# Altium PCB Power Reg Breakout V1.PcbDoc (part 1 of 2)
Units mil, origin at the board's own origin, x right, y up, seen from the top; angles counter-clockwise.
Board outline 1959 x 2445 mil, 2 copper layers (Top Layer, Bottom Layer); 83 components, 39 nets, 230 pads, 125 vias.
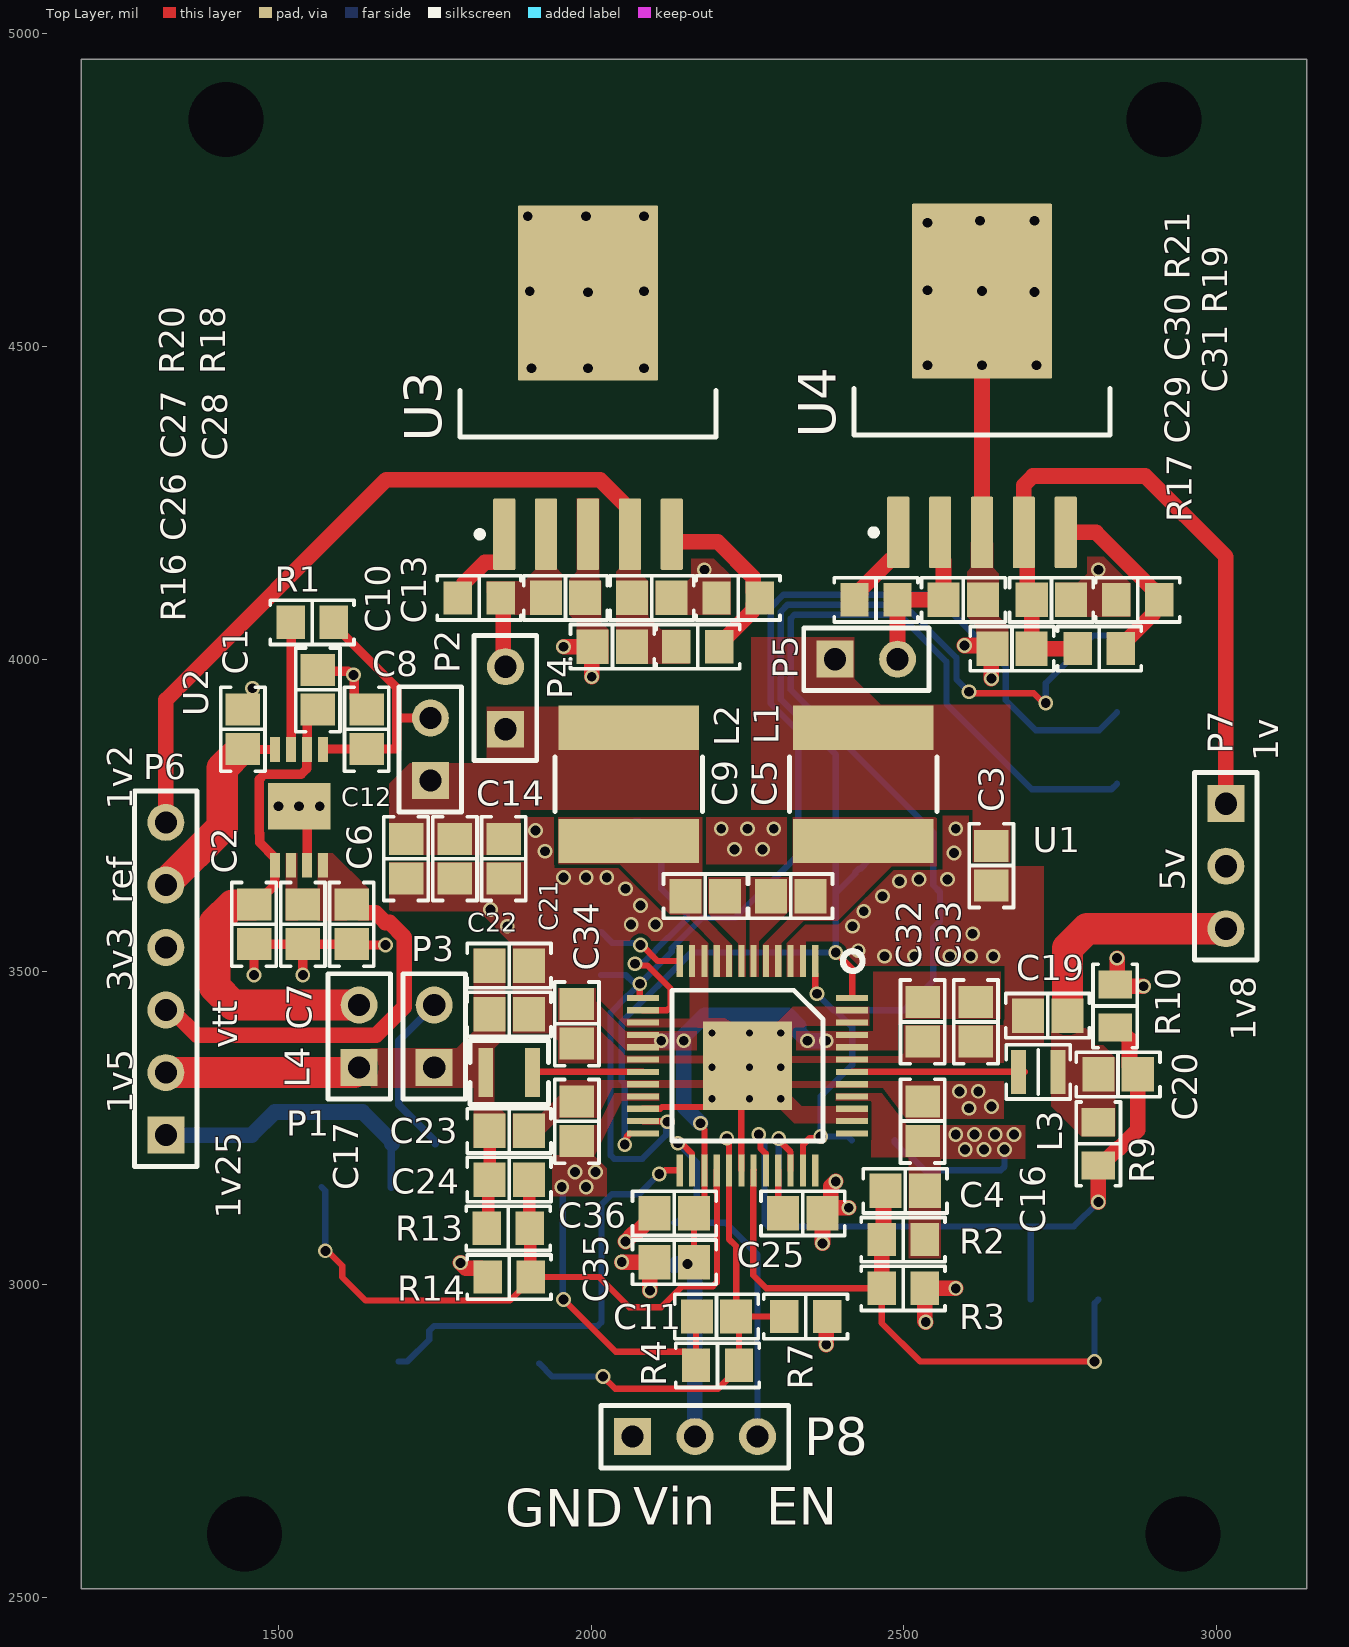
[diagram p0: Top Layer view]
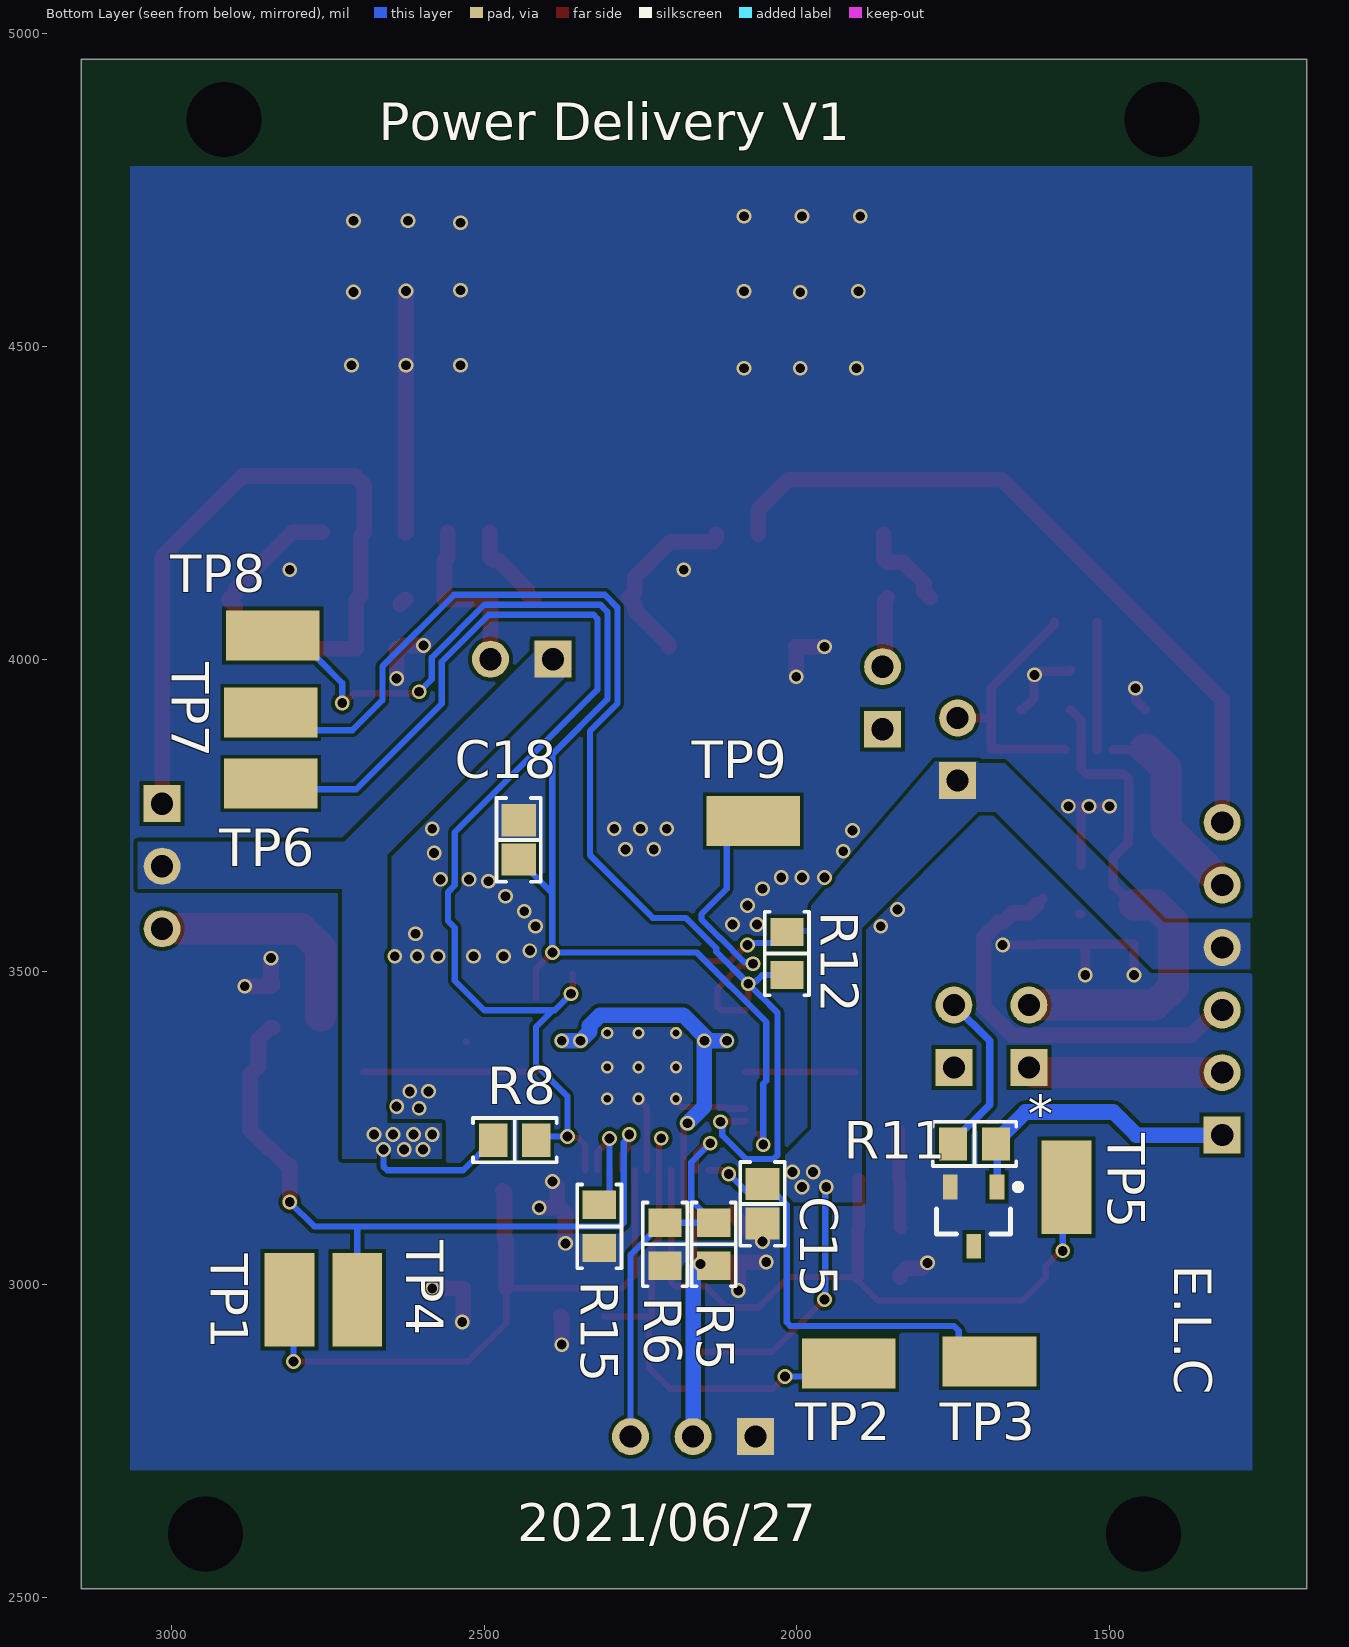
[diagram p1: Bottom Layer view, seen from below]
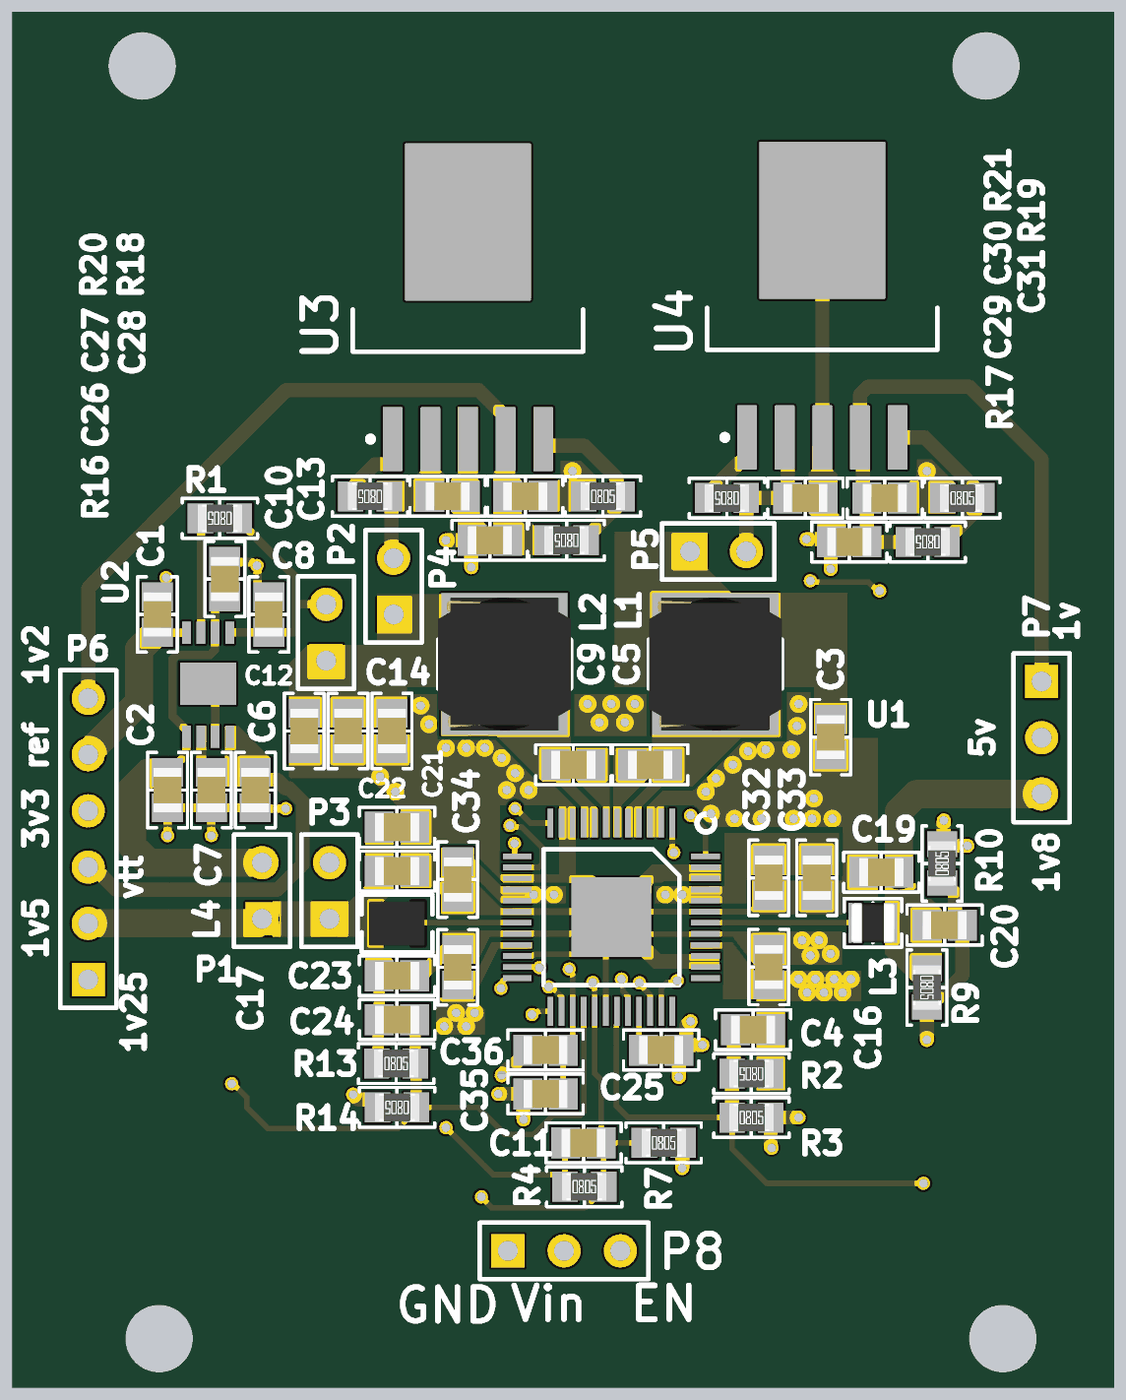
[diagram p2: 3D render of the assembled board from above, using the file's embedded part models]
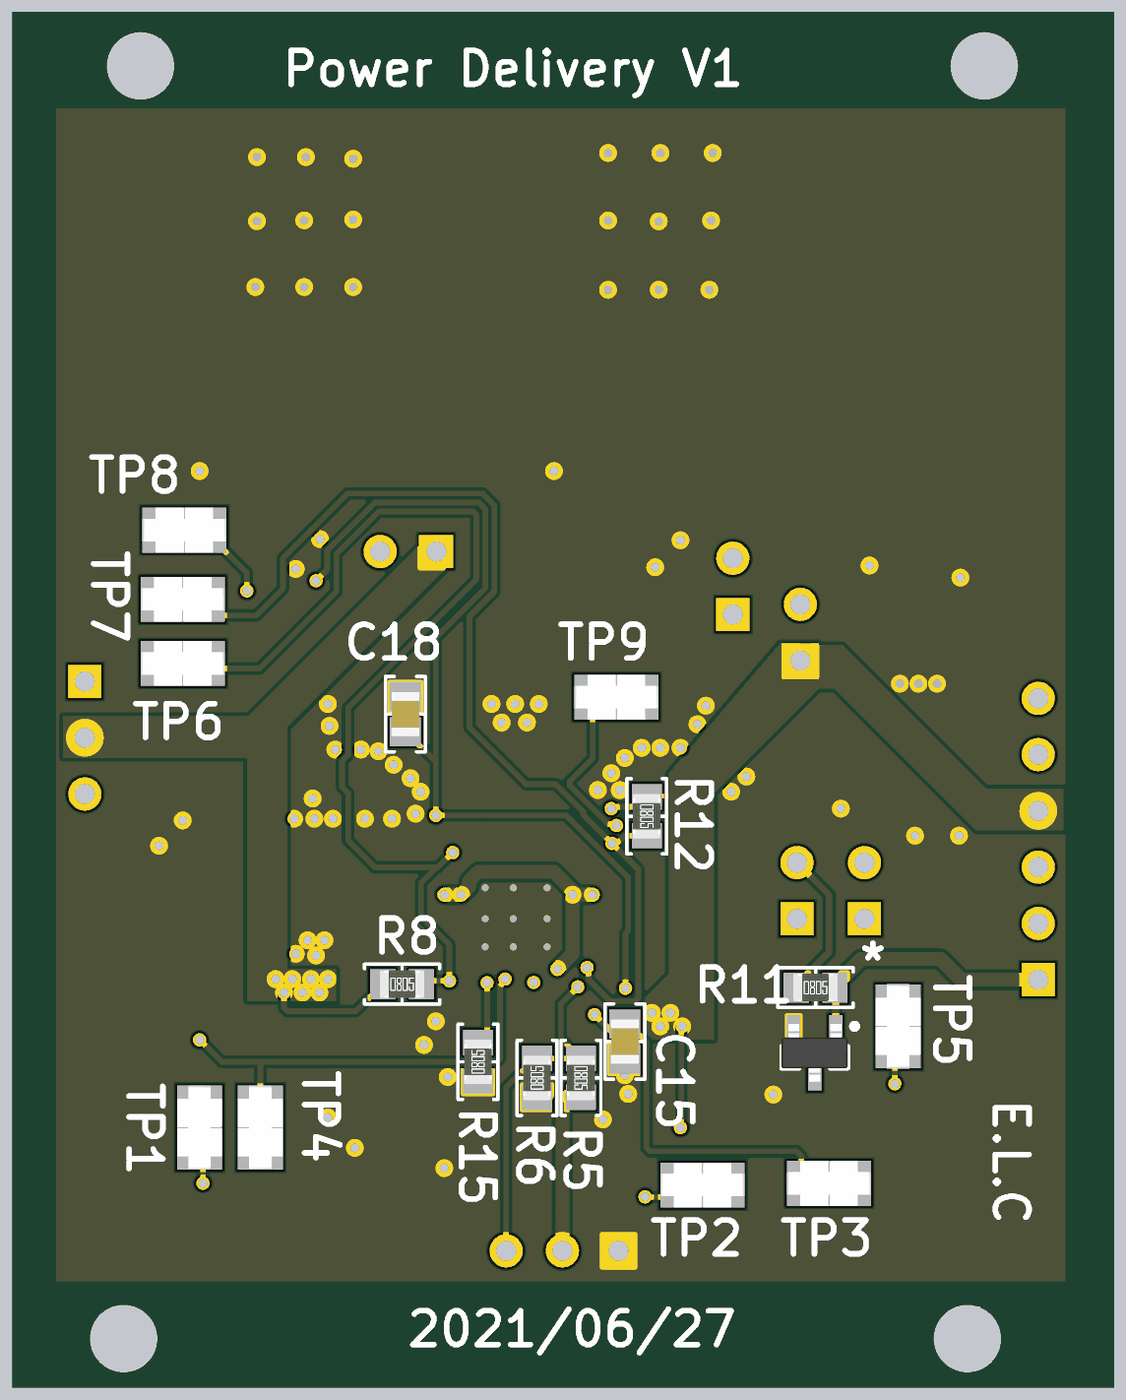
[diagram p3: 3D render of the assembled board from below, using the file's embedded part models]

## Layer stack, top to bottom
Top Solder: solder mask 0.4, Solder Resist, Dk 3.5
Top Layer: signal copper 1.4
Dielectric 1: dielectric 12.6, FR-4, Dk 4.8
Bottom Layer: signal copper 1.4
Bottom Solder: solder mask 0.4, Solder Resist, Dk 3.5

## Board outline
1185,2514 3144,2514 3144,4959 1185,4959

## Design rules (kind name [scope] priority, off if disabled: settings)
Clearance [All] p1: gap=6 ignorepadtopadclearanceinfootprint=FALSE
PolygonConnect [All] p1: connectstyle=Direct reliefconductorwidth=10 reliefentries=4 polygonreliefangle="90 Angle" airgapwidth=10
RoutingVias [All] p1: holewidth=15.75 width=23.62 viastyle="Through Hole" minholewidth=7.87 minwidth=15.75 maxholewidth=248.03 maxwidth=50
SolderMaskExpansion [All] p1: expansion=4 istentingtop=FALSE
Width [All] p1: maxlimit=60 minlimit=6 preferedwidth=10
30 further rules are at their usual default settings.

## Classes and differential pairs
component class "Power Regulator Breakout V1": P6 P7 P8

## Components (designator, comment, footprint, x,y, rotation, side; value= is the part's Value field where it differs from the comment)
* "1.25V Shunt" TS4061AILT-1.25 1717.4,3108.76 r270 bottom
C1 "0.1µF" "CAP 0805_2012" 1443,3888 r90 top
C2 "10µF" "CAP 0805_2012" 1461,3576 r270 top
C3 "1µF" "CAP 0805_2012" 2640,3670 r90 top
C4 "10pF" "CAP 0805_2012" 2502,3150 r0 top
C5 "0.1µF" "CAP 0805_2012" 2319,3621 r0 top
C6 "10µF" "CAP 0805_2012" 1617,3576 r90 top
C7 "10µF" "CAP 0805_2012" 1539,3576 r90 top
C8 "4.7µF" "CAP 0805_2012" 1641,3888 r270 top
C9 "0.1µF" "CAP 0805_2012" 2182.5,3621 r180 top
C10 "0.1µF" "CAP 0805_2012" 1563,3951 r270 top
C11 "22pF" "CAP 0805_2012" 2200.5,2949 r180 top
C12 "10µF" "CAP 0805_2012" 1704,3681 r90 top
C13 "10µF" "CAP 0805_2012" 1782,3681 r90 top
C14 "4.7µF" "CAP 0805_2012" 1860,3681 r90 top
C15 "1000pF" "CAP 0805_2012" 2055,3129 r90 bottom
C16 "4.7µF" "CAP 0805_2012" 2530,3261.5 r270 top
C17 "4.7µF" "CAP 0805_2012" 1977,3261 r270 top
C18 "1000pF" "CAP 0805_2012" 2445,3711 r270 bottom
C19 "10µF" "CAP 0805_2012" 2730,3430 r0 top
C20 "22pF" "CAP 0805_2012" 2842.5,3336 r180 top
C21 "10µF" "CAP 0805_2012" 1869,3432 r180 top
C22 "10µF" "CAP 0805_2012" 1869,3510 r180 top
C23 "10µF" "CAP 0805_2012" 1869,3246 r180 top
C24 "22pF" "CAP 0805_2012" 1869,3168 r180 top
C25 "4.7µF" "CAP 0805_2012" 2338.5,3114 r180 top
C26 "10µF" "CAP 0805_2012" 1959,4098 r0 top
C27 "10µF" "CAP 0805_2012" 2097,4098 r0 top
C28 "10µF" "CAP 0805_2012" 2034,4020 r180 top
C29 "10µF" "CAP 0805_2012" 2595,4095 r0 top
C30 "10µF" "CAP 0805_2012" 2736,4095 r0 top
C31 "10µF" "CAP 0805_2012" 2673,4017 r180 top
C32 "10µF" "CAP 0805_2012" 2530,3420 r270 top
C33 "10µF" "CAP 0805_2012" 2615,3420 r270 top
C34 "10µF" "CAP 0805_2012" 1977,3417 r270 top
C35 "10µF" "CAP 0805_2012" 2133,3036 r180 top
C36 "10µF" "CAP 0805_2012" 2133,3114 r180 top
L1 "2.2µH" "WURTH WE-LQS 6045" 2435,3800 r90 top
L2 "2.2µH" "WURTH WE-LQS 6045" 2060,3800 r90 top
L3 "1µH" "IND 0806_2016" 2715,3340 r0 top
L4 "1.5µH" "TDK VLS252012HBX-1" 1869,3339 r180 top
P1 "Header 2" HDR1X2 1629,3347 r90 top
P2 "Header 2" HDR1X2 1743,3806 r90 top
P3 "Header 2" HDR1X2 1749,3347 r90 top
P4 "Header 2" HDR1X2 1863,3888 r90 top
P5 "Header 2" HDR1X2 2390,4000 r0 top
P6 "Header 6" HDR1X6 1320,3239 r90 top
P7 "Header 3" HDR1X3 3015,3769 r270 top
P8 "Header 3" HDR1X3 2066,2757 r0 top
R1 "100 kOhms" "RES 0805_2012" 1554,4059 r180 top
R2 "40 kOhms" "RES 0805_2012" 2499,3072 r180 top
R3 "10 kOhms" "RES 0805_2012" 2499,2994 r0 top
R4 "316 kOhms" "RES 0805_2012" 2202,2871 r0 top
R5 "48.7 kOhms" "RES 0805_2012" 2133,3064.45 r270 bottom
R6 "10 kOhms" "RES 0805_2012" 2211,3064.45 r90 bottom
R7 "137 kOhms" "RES 0805_2012" 2343,2949 r0 top
R8 "10 kOhms" "RES 0805_2012" 2451,3231 r180 bottom
R9 "249 kOhms" "RES 0805_2012" 2811,3225 r270 top
R10 "200 kOhms" "RES 0805_2012" 2838,3445.45 r90 top
R11 "2.49 kOhms" "RES 0805_2012" 1716,3225 r180 bottom
R12 "10 kOhms" "RES 0805_2012" 2016,3529.45 r270 bottom
R13 "174 kOhms" "RES 0805_2012" 1867.45,3090 r0 top
R14 "200 kOhms" "RES 0805_2012" 1869,3012 r180 top
R15 "26.7 Ohms" "RES 0805_2012" 2316,3093 r90 bottom
R16 "10 kOhms" "RES 0805_2012" 1821,4098 r180 top
R17 "10 kOhms" "RES 0805_2012" 2455.45,4095 r180 top
R18 "10 kOhms" "RES 0805_2012" 2170.55,4020 r180 top
R19 "3.92 kOhms" "RES 0805_2012" 2812.55,4017 r180 top
R20 "10 kOhms" "RES 0805_2012" 2235,4098 r0 top
R21 "6.04 kOhms" "RES 0805_2012" 2874,4095 r0 top
TP1 "5019" KSTN-5019_V 2811,2976 r270 bottom
TP2 "5019" KSTN-5019_V 1917,2874 r180 bottom
TP3 "5019" KSTN-5019_V 1692,2877 r180 bottom
TP4 "5019" KSTN-5019_V 2703,2976 r270 bottom
TP5 "5019" KSTN-5019_V 1569,3156 r270 bottom
TP6 "5019" KSTN-5019_V 2841,3801 r180 bottom
TP7 "5019" KSTN-5019_V 2841,3915 r180 bottom
TP8 "5019" KSTN-5019_V 2838,4038 r180 bottom
TP9 "5019" KSTN-5019_V 2070,3741 r180 bottom
U1 "LT8602ILXE" Quad48 2358.27,3517.32 r270 top
U2 "MP20075DH-LF-P" MP20075 1533,3765 r0 top
U3 "LP38502TJ-ADJ/NOPB" NDQ0005A_L 1995,4434 r90 top
U4 "LP38502TJ-ADJ/NOPB" NDQ0005A_L 2625,4437 r90 top

## Footprints (in the part's own frame and the unit in brackets; to place one, negate y for a bottom-side part, rotate by r counter-clockwise, add the part's x,y. Pads: shape width x height; smd on the part's side, far side on the other; paste and mask are expansions set on the pad)
"CAP 0805_2012" [mm] "Chip Capacitor, 2-Leads, Body 2.00x1.20mm, IPC Medium Density"
  rect 1.3x1.4 smd: 1(-0.8,0) 2(0.8,0)
  silkscreen extent -1.7,-0.9 1.7,0.9, body extent -1,-0.64 1,0.64, height 1.26
HDR1X2 [mm] "Connector; Header; 2 Position"
  rect 1.5x1.5 hole 0.9: 1(0,0)
  round 1.5 hole 0.9: 2(2.54,0)
  silkscreen extent -1.27,-1.27 3.81,1.27
HDR1X3 [mm] "Connector; Header; 3 Position"
  rect 1.5x1.5 hole 0.9: 1(0,0)
  round 1.5 hole 0.9: 2(2.54,0) 3(5.08,0)
  silkscreen extent -1.27,-1.27 6.35,1.27
HDR1X6 [mm] "Connector; Header; 6 Position"
  rect 1.5x1.5 hole 0.9: 1(0,0)
  round 1.5 hole 0.9: 2(2.54,0) 3(5.08,0) 4(7.62,0) 5(10.16,0) 6(12.7,0)
  silkscreen extent -1.27,-1.27 13.97,1.27
"IND 0806_2016" [mm] "Chip Capacitor, 2-Leads, Body 2.00x1.20mm, IPC Medium Density"
  rect 0.6x1.8 smd: 1(-0.8,0) 2(0.8,0)
  silkscreen extent -1.3,-1.1 1.3,1.1, body extent -1.01,-0.91 1.01,0.91, height 1.81
KSTN-5019_V [mm] "Test Point, 1-Leads, Body 3.81x2.03mm"
  rect 3.8x2.03 smd: 1(0,0)
  body extent -1.91,-1.02 1.9,1.02, height 2.29
MP20075 [mm]
  rect 0.4x1 smd: 1(-0.975,-2.4) 2(-0.325,-2.4) 3(0.325,-2.4) 4(0.975,-2.4) 5(0.975,2.3) 6(0.325,2.3) 7(-0.325,2.3) 8(-0.975,2.3)
  rect 2.54x1.9 smd: 9(0,0)
NDQ0005A_L [mm] "D2-PAK, 6-Leads, Body 9.9x10.2mm, Pitch 1.7mm, Lead Span 14mm, IPC High Density"
  rrect11% 2.9x0.9 smd: 1(-5.95,3.4) 2(-5.95,1.7) 3(-5.95,0) 4(-5.95,-1.7) 5(-5.95,-3.4)
  rrect2% 7.1x5.7 smd: 6(3.85,0)
  silkscreen extent -6.07,-5.2 -0.1,5.2, body extent -2,-5.2 8.1,5.2, height 2.1
Quad48 [mm]
  rect 1.3x0.25 smd: 1(0,0) 2(0,-0.5) 3(0,-1) 4(0,-1.5) 5(0,-2) 6(0,-2.5) 7(0,-3) 8(0,-3.5) 9(0,-4) 10(0,-4.5) 11(0,-5) 12(0,-5.5) 25(8.5,-5.5) 26(8.5,-5) 27(8.5,-4.5) 28(8.5,-4) 29(8.5,-3.5) 30(8.5,-3) 31(8.5,-2.5) 32(8.5,-2) 33(8.5,-1.5) 34(8.5,-1) 35(8.5,-0.5) 36(8.5,0)
  rect 0.25x1.3 smd: 13(1.5,-7) 14(2,-7) 15(2.5,-7) 16(3,-7) 17(3.5,-7) 18(4,-7) 19(4.5,-7) 20(5,-7) 21(5.5,-7) 22(6,-7) 23(6.5,-7) 24(7,-7) 37(7,1.5) 38(6.5,1.5) 39(6,1.5) 40(5.5,1.5) 41(5,1.5) 42(4.5,1.5) 43(4,1.5) 44(3.5,1.5) 45(3,1.5) 46(2.5,1.5) 47(2,1.5) 48(1.5,1.5)
  rect 3.6x3.6 smd: 49(4.25,-2.75)
  silkscreen extent -0.4,-5.81 7.31,1.93
"RES 0805_2012" [mm] "Chip Resistor, 2-Leads, Body 2.00x1.25mm, IPC Medium Density"
  rect 1.15x1.35 smd: 1(-0.875,0) 2(0.875,0)
  silkscreen extent -1.7,-0.9 1.7,0.9, body extent -1,-0.62 1,0.63, height 0.6
"TDK VLS252012HBX-1" [mm] "Inductor, 2-Leads, Body 2.50x2.00mm, IPC Medium Density"
  rect 0.6x2 smd: 1(-0.95,0) 2(0.95,0)
  silkscreen extent -1.6,-1.3 1.6,1.3, body extent -1.25,-1 1.25,1, height 1.2
TS4061AILT-1.25 [mm] "SOT23, 3-Leads, Body 2.90x2.45mm, Pitch 0.95mm, IPC Medium Density"
  rect 1x0.6 smd: 1(-1.2,0.95) 2(-1.2,-0.95) 3(1.2,0)
  silkscreen extent -1.32,-1.5 0.7,1.92, body extent -1.3,-1.5 1.3,1.5, height 1.12
"WURTH WE-LQS 6045" [mm] "SMD Power Inductor, 2-Leads, body 6x6mm"
  rect 1.8x5.7 smd: 1(-2.3,0) 2(2.3,0)
  silkscreen extent -1.1,-3 1.1,3, body extent -3,-3 3,3, height 4.5

## Part data
C1 C10: library part 08055C104KAT4A, "CAP CER 0.1UF 50V X7R 0805", Device Package="0805 (2012 Metric)", Manufacturer="AVX Corporation", Operating Temperature="-55°C ~ 125°C", Supplier Part Number 1=478-10836-1-ND, Temperature Coefficient=X7R, Tolerance=±10%, Voltage - Rated=50V, Applications="General Purpose", Capacitance=0.1µF, ComponentLink1Description=Datasheet, ComponentLink1URL=http://datasheets.avx.com/X7RDielectric.pdf, ComponentLink2Description="DigiKey Link", ComponentLink2URL=http://digikey.com/product-detail/en/avx-corporation/08055C104KAT4A/478-10836-1-ND/7536355, LastUpdated="2020-09-02 1:04:35 AM", Lifecycle Status=Active, Minimum Order=1, Mounting Type="Surface Mount, MLCC", Package / Case="0805 (2012 Metric)", Packaging=TapeAndReel, Part Number=08055C104KAT4A, Part Status=Active, PartId=6258, Price=0.01, Series=-, Size / Dimension="0.079\" L x 0.049\" W (2.01mm x 1.25mm)", Supplier 1=DigiKey, Thickness (Max)="0.037\" (0.94mm)"
C2 C6 C7 C12 C13 C19 C21 C22 C23 C26 C27 C28 C29 C30 C31 C32 C33 C34 C35 C36: library part CL21B106KQQNFNE, "CAP CER 10UF 6.3V X7R 0805", Device Package="0805 (2012 Metric)", Manufacturer="Samsung Electro-Mechanics", Operating Temperature="-55°C ~ 125°C", Supplier Part Number 1=1276-2935-1-ND, Temperature Coefficient=X7R, Tolerance=±10%, Voltage - Rated=6.3V, Applications="General Purpose", Capacitance=10µF, ComponentLink1Description=Datasheet, ComponentLink1URL=http://www.samsungsem.com/kr/support/product-search/mlcc/CL21B106KQQNFNE.jsp, ComponentLink2Description="DigiKey Link", ComponentLink2URL=http://digikey.com/product-detail/en/samsung-electro-mechanics/CL21B106KQQNFNE/1276-2935-1-ND/3891021, LastUpdated="2020-09-02 1:04:08 AM", Lifecycle Status=Active, Minimum Order=1, Mounting Type="Surface Mount, MLCC", Package / Case="0805 (2012 Metric)", Packaging=TapeAndReel, Part Number=CL21B106KQQNFNE, Part Status=Active, PartId=17977, Price=0.05, Series=CL, Size / Dimension="0.079\" L x 0.049\" W (2.00mm x 1.25mm)", Supplier 1=DigiKey, Thickness (Max)="0.055\" (1.40mm)"
C3: library part 885012207078, "CAP CER 1UF 25V X7R 0805", Device Package="0805 (2012 Metric)", Manufacturer="Würth Elektronik", Operating Temperature="-55°C ~ 125°C", Supplier Part Number 1=732-7672-1-ND, Temperature Coefficient=X7R, Tolerance=±10%, Voltage - Rated=25V, Applications="General Purpose", Capacitance=1µF, ComponentLink1Description=Datasheet, ComponentLink1URL=https://katalog.we-online.de/pbs/datasheet/885012207078.pdf, ComponentLink2Description="DigiKey Link", ComponentLink2URL=http://digikey.com/product-detail/en/w-rth-elektronik/885012207078/732-7672-1-ND/5454299, LastUpdated="2020-09-02 1:04:13 AM", Lifecycle Status=Active, Minimum Order=1, Mounting Type="Surface Mount, MLCC", Package / Case="0805 (2012 Metric)", Packaging=TapeAndReel, Part Number=885012207078, Part Status=Active, PartId=16212, Price=0.06, Series=WCAP-CSGP, Size / Dimension="0.079\" L x 0.049\" W (2.00mm x 1.25mm)", Supplier 1=DigiKey, Thickness (Max)="0.053\" (1.35mm)"
C4: library part C0805C100K5GACTU, "CAP CER 10PF 50V C0G/NP0 0805", Device Package="0805 (2012 Metric)", Manufacturer=KEMET, Operating Temperature="-55°C ~ 125°C", Supplier Part Number 1=399-7975-1-ND, Temperature Coefficient="C0G, NP0", Tolerance=±10%, Voltage - Rated=50V, Applications="General Purpose", Capacitance=10pF, ComponentLink1Description=Datasheet, ComponentLink1URL=https://api.kemet.com/component-edge/download/datasheet/C0805C100K5GACTU.pdf, ComponentLink2Description="DigiKey Link", ComponentLink2URL=http://digikey.com/product-detail/en/kemet/C0805C100K5GACTU/399-7975-1-ND/3471698, Features="Low ESL", LastUpdated="2020-09-02 1:04:20 AM", Lifecycle Status=Active, Minimum Order=1, Mounting Type="Surface Mount, MLCC", Package / Case="0805 (2012 Metric)", Packaging=TapeAndReel, Part Number=C0805C100K5GACTU, Part Status=Active, PartId=14017, Price=0.01, Series="SMD Comm C0G", Size / Dimension="0.079\" L x 0.049\" W (2.00mm x 1.25mm)", Supplier 1=DigiKey, Thickness (Max)="0.035\" (0.88mm)"
C5 C9: library part C0805C104M5RACTU, "CAP CER 0.1UF 50V X7R 0805", Device Package="0805 (2012 Metric)", Manufacturer=KEMET, Operating Temperature="-55°C ~ 125°C", Supplier Part Number 1=399-1169-1-ND, Temperature Coefficient=X7R, Tolerance=±20%, Voltage - Rated=50V, Applications="Bypass, Decoupling", Capacitance=0.1µF, ComponentLink1Description=Datasheet, ComponentLink1URL=https://api.kemet.com/component-edge/download/datasheet/C0805C104M5RACTU.pdf, ComponentLink2Description="DigiKey Link", ComponentLink2URL=http://digikey.com/product-detail/en/kemet/C0805C104M5RACTU/399-1169-1-ND/411444, LastUpdated="2020-09-02 1:04:36 AM", Lifecycle Status=Active, Minimum Order=1, Mounting Type="Surface Mount, MLCC", Package / Case="0805 (2012 Metric)", Packaging=TapeAndReel, Part Number=C0805C104M5RACTU, Part Status=Active, PartId=5793, Price=0.01, Series="SMD Comm X7R", Size / Dimension="0.079\" L x 0.049\" W (2.00mm x 1.25mm)", Supplier 1=DigiKey, Thickness (Max)="0.035\" (0.88mm)"
C8 C14 C16 C17 C25: library part GRM21BR71C475KE51L, "CAP CER 4.7UF 16V X7R 0805", Device Package="0805 (2012 Metric)", Manufacturer="Murata Electronics", Operating Temperature="-55°C ~ 125°C", Supplier Part Number 1=490-14466-1-ND, Temperature Coefficient=X7R, Tolerance=±10%, Voltage - Rated=16V, Applications="General Purpose", Capacitance=4.7µF, ComponentLink1Description=Datasheet, ComponentLink1URL=https://search.murata.co.jp/Ceramy/image/img/A01X/G101/ENG/GRM21BR71C475KE51-01.pdf, ComponentLink2Description="DigiKey Link", ComponentLink2URL=http://digikey.com/product-detail/en/murata-electronics/GRM21BR71C475KE51L/490-14466-1-ND/6606927, LastUpdated="2020-09-02 1:04:31 AM", Lifecycle Status=Active, Minimum Order=1, Mounting Type="Surface Mount, MLCC", Package / Case="0805 (2012 Metric)", Packaging=TapeAndReel, Part Number=GRM21BR71C475KE51L, Part Status=Active, PartId=8696, Price=0.04, Series=GRM, Size / Dimension="0.079\" L x 0.049\" W (2.00mm x 1.25mm)", Supplier 1=DigiKey, Thickness (Max)="0.055\" (1.40mm)"
C11 C20 C24: library part C0805C220J5RAC7800, "CAP CER SMD 0805 22PF 5% 50V X7R", Device Package="0805 (2012 Metric)", Manufacturer=KEMET, Operating Temperature="-55°C ~ 125°C", Supplier Part Number 1=399-17625-1-ND, Temperature Coefficient=X7R, Tolerance=±5%, Voltage - Rated=50V, Applications="Bypass, Decoupling", Capacitance=22pF, ComponentLink1Description=Datasheet, ComponentLink1URL=https://api.kemet.com/component-edge/download/datasheet/C0805C220J5RAC7800.pdf, ComponentLink2Description="DigiKey Link", ComponentLink2URL=http://digikey.com/product-detail/en/kemet/C0805C220J5RAC7800/399-17625-1-ND/8572625, LastUpdated="2020-09-02 1:04:09 AM", Lifecycle Status=Active, Minimum Order=1, Mounting Type="Surface Mount, MLCC", Package / Case="0805 (2012 Metric)", Packaging=TapeAndReel, Part Number=C0805C220J5RAC7800, Part Status=Active, PartId=17442, Price=0.03, Series="SMD Comm X7R", Size / Dimension="0.079\" L x 0.049\" W (2.00mm x 1.25mm)", Supplier 1=DigiKey, Thickness (Max)="0.035\" (0.88mm)"
C15 C18: library part 885012207033, "CAP CER 1000PF 16V X7R 0805", Device Package="0805 (2012 Metric)", Manufacturer="Würth Elektronik", Operating Temperature="-55°C ~ 125°C", Supplier Part Number 1=732-8033-1-ND, Temperature Coefficient=X7R, Tolerance=±10%, Voltage - Rated=16V, Applications="General Purpose", Capacitance=1000pF, ComponentLink1Description=Datasheet, ComponentLink1URL=https://katalog.we-online.de/pbs/datasheet/885012207033.pdf, ComponentLink2Description="DigiKey Link", ComponentLink2URL=http://digikey.com/product-detail/en/w-rth-elektronik/885012207033/732-8033-1-ND/5454660, LastUpdated="2020-09-02 1:04:24 AM", Lifecycle Status=Active, Minimum Order=1, Mounting Type="Surface Mount, MLCC", Package / Case="0805 (2012 Metric)", Packaging=TapeAndReel, Part Number=885012207033, Part Status=Active, PartId=12259, Price=0.03, Series=WCAP-CSGP, Size / Dimension="0.079\" L x 0.049\" W (2.00mm x 1.25mm)", Supplier 1=DigiKey, Thickness (Max)="0.035\" (0.90mm)"
L1 L2: library part 74404064022, "FIXED IND 2.2UH 4.6A 14 MOHM SMD", Current - Saturation=7.4A, Current Rating (Amps)=4.6A, DC Resistance (DCR)=14mOhm, Device Package=Nonstandard, Frequency - Self Resonant=60MHz, Inductance Frequency - Test=100kHz, Manufacturer="Würth Elektronik", Operating Temperature="-40°C ~ 125°C", Supplier Device Package=6045, Supplier Part Number 1=732-5544-1-ND, Tolerance=±30%, ComponentLink1Description=Datasheet, ComponentLink1URL=https://katalog.we-online.de/pbs/datasheet/74404064022.pdf, ComponentLink2Description="DigiKey Link", ComponentLink2URL=http://digikey.com/product-detail/en/w-rth-elektronik/74404064022/732-5544-1-ND/4865437, Height - Seated (Max)="0.177\" (4.50mm)", Inductance=2.2µH, LastUpdated="2020-08-13 11:04:46 AM", Lifecycle Status=Active, Material - Core=Ferrite, Minimum Order=1, Mounting Type="Surface Mount", Package / Case=Nonstandard, Packaging=TapeAndReel, Part Number=74404064022, Part Status=Active, PartId=3699, Price=0.69, Series=WE-LQS, Shielding=Shielded, Size / Dimension="0.236\" L x 0.236\" W (6.00mm x 6.00mm)", Supplier 1=DigiKey, Type=Wirewound
L3: library part VLS201612HBX-1R0M-1, "FIXED IND 1UH 2.7A 72 MOHM SMD", Current - Saturation=2.42A, Current Rating (Amps)=2.7A, DC Resistance (DCR)="72mOhm Max", Device Package="0806 (2016 Metric)", Inductance Frequency - Test=1MHz, Manufacturer="TDK Corporation", Operating Temperature="-40°C ~ 105°C", Supplier Part Number 1=445-173010-1-ND, Tolerance=±20%, ComponentLink1Description=Datasheet, ComponentLink1URL=https://product.tdk.com/info/en/catalog/datasheets/inductor_commercial_power_vls201612hbx-1_en.pdf?ref_disty=digikey, ComponentLink2Description="DigiKey Link", ComponentLink2URL=http://digikey.com/product-detail/en/tdk-corporation/VLS201612HBX-1R0M-1/445-173010-1-ND/5250929, Height - Seated (Max)="0.047\" (1.20mm)", Inductance=1µH, LastUpdated="2020-09-02 1:24:35 AM", Lifecycle Status=Active, Material - Core=Metal, Minimum Order=1, Mounting Type="Surface Mount", Package / Case="0806 (2016 Metric)", Packaging=TapeAndReel, Part Number=VLS201612HBX-1R0M-1, Part Status=Active, PartId=225, Price=0.13, Series=VLS-HBX-1, Shielding=Shielded, Size / Dimension="0.079\" L x 0.063\" W (2.00mm x 1.60mm)", Supplier 1=DigiKey, Supplier Device Package="0806 (2016 Metric)", Type=Wirewound
L4: library part VLS252012HBX-1R5M-1, "FIXED IND 1.5UH 2.75A 82 MOHM", Current - Saturation=2.5A, Current Rating (Amps)=2.75A, DC Resistance (DCR)="82mOhm Max", Device Package="1008 (2520 Metric)", Inductance Frequency - Test=1MHz, Manufacturer="TDK Corporation", Operating Temperature="-40°C ~ 105°C", Supplier Part Number 1=445-173026-1-ND, Tolerance=±20%, ComponentLink1Description=Datasheet, ComponentLink1URL=https://product.tdk.com/info/en/catalog/datasheets/inductor_commercial_power_vls252012hbx-1_en.pdf?ref_disty=digikey, ComponentLink2Description="DigiKey Link", ComponentLink2URL=http://digikey.com/product-detail/en/tdk-corporation/VLS252012HBX-1R5M-1/445-173026-1-ND/5250945, Height - Seated (Max)="0.047\" (1.20mm)", Inductance=1.5µH, LastUpdated="2020-09-02 1:22:18 AM", Lifecycle Status=Active, Material - Core=Metal, Minimum Order=1, Mounting Type="Surface Mount", Package / Case="1008 (2520 Metric)", Packaging=TapeAndReel, Part Number=VLS252012HBX-1R5M-1, Part Status=Active, PartId=239, Price=0.14, Series=VLS-HBX-1, Shielding=Shielded, Size / Dimension="0.098\" L x 0.079\" W (2.50mm x 2.00mm)", Supplier 1=DigiKey, Supplier Device Package="1008 (2520 Metric)", Type=Wirewound
P1 P2 P3 P4 P5: "Header, 2-Pin", LatestRevisionDate=17-Jul-2002, LatestRevisionNote="Re-released for DXP Platform.", Publisher="Altium Limited"
P6: "Header, 6-Pin", LatestRevisionDate=17-Jul-2002, LatestRevisionNote="Re-released for DXP Platform.", Publisher="Altium Limited"
P7 P8: "Header, 3-Pin", LatestRevisionDate=17-Jul-2002, LatestRevisionNote="Re-released for DXP Platform.", Publisher="Altium Limited"
R1: library part CR0805-FX-1003ELF, "RES SMD 100K OHM 1% 1/8W 0805", Device Package="0805 (2012 Metric)", Manufacturer="Bourns Inc.", Operating Temperature="-55°C ~ 155°C", Power (Watts)="0.125W, 1/8W", Supplier Device Package=0805, Supplier Part Number 1=CR0805-FX-1003ELFCT-ND, Temperature Coefficient=±100ppm/°C, Tolerance=±1%, ComponentLink1Description=Datasheet, ComponentLink1URL=https://www.bourns.com/docs/Product-Datasheets/CHPREZTR.pdf, ComponentLink2Description="DigiKey Link", ComponentLink2URL=http://digikey.com/product-detail/en/bourns-inc/CR0805-FX-1003ELF/CR0805-FX-1003ELFCT-ND/3740923, Composition="Thick Film", Features="Moisture Resistant", Height - Seated (Max)="0.024\" (0.60mm)", LastUpdated="2020-09-02 1:14:46 AM", Lifecycle Status=Active, Minimum Order=1, Number of Terminations=2, Package / Case="0805 (2012 Metric)", Packaging=CutTape, Part Number=CR0805-FX-1003ELF, Part Status=Active, PartId=44720, Price=0.10, Resistance="100 kOhms", Series=CR0805, Size / Dimension="0.079\" L x 0.049\" W (2.00mm x 1.25mm)", Supplier 1=DigiKey
R2: library part CRCW080540K0FKEA, "RES SMD 40K OHM 1% 1/8W 0805", Device Package="0805 (2012 Metric)", Manufacturer="Vishay Dale", Operating Temperature="-55°C ~ 155°C", Power (Watts)="0.125W, 1/8W", Ratings=AEC-Q200, Supplier Device Package=0805, Supplier Part Number 1=541-CRCW080540K0FKEACT-ND, Temperature Coefficient=±100ppm/°C, Tolerance=±1%, ComponentLink1Description=Datasheet, ComponentLink1URL=http://www.vishay.com/docs/20035/dcrcwe3.pdf, ComponentLink2Description="DigiKey Link", ComponentLink2URL=http://digikey.com/product-detail/en/vishay-dale/CRCW080540K0FKEA/541-CRCW080540K0FKEACT-ND/11501179, Composition="Thick Film", Features="Automotive AEC-Q200", LastUpdated="2020-09-02 1:14:22 AM", Lifecycle Status=Active, Minimum Order=1, Number of Terminations=2, Package / Case="0805 (2012 Metric)", Packaging=TapeAndReel, Part Number=CRCW080540K0FKEA, PartId=57108, Price=0.01, Resistance="40 kOhms", Series=CRCW, Supplier 1=DigiKey
R3 R6 R8 R12 R16 R17 R18 R20: library part RMCF0805FT10K0, "RES 10K OHM 1% 1/8W 0805", Device Package="0805 (2012 Metric)", Manufacturer="Stackpole Electronics Inc", Operating Temperature="-55°C ~ 155°C", Power (Watts)="0.125W, 1/8W", Ratings=AEC-Q200, Supplier Device Package=0805, Supplier Part Number 1=RMCF0805FT10K0CT-ND, Temperature Coefficient=±100ppm/°C, Tolerance=±1%, ComponentLink1Description=Datasheet, ComponentLink1URL=https://www.seielect.com/catalog/sei-rmcf_rmcp.pdf, ComponentLink2Description="DigiKey Link", ComponentLink2URL=http://digikey.com/product-detail/en/stackpole-electronics-inc/RMCF0805FT10K0/RMCF0805FT10K0CT-ND/1942435, Composition="Thick Film", Features="Automotive AEC-Q200", Height - Seated (Max)="0.026\" (0.65mm)", LastUpdated="2020-09-02 1:14:38 AM", Lifecycle Status=Active, Minimum Order=1, Number of Terminations=2, Package / Case="0805 (2012 Metric)", Packaging=CutTape, Part Number=RMCF0805FT10K0, Part Status=Active, PartId=47306, Price=0.10, Resistance="10 kOhms", Series=RMCF, Size / Dimension="0.079\" L x 0.049\" W (2.00mm x 1.25mm)", Supplier 1=DigiKey
R4: library part ERJ-6ENF3163V, "RES SMD 316K OHM 1% 1/8W 0805", Device Package="0805 (2012 Metric)", Manufacturer="Panasonic Electronic Components", Operating Temperature="-55°C ~ 155°C", Power (Watts)="0.125W, 1/8W", Ratings=AEC-Q200, Supplier Device Package=0805, Supplier Part Number 1=P316KCCT-ND, Temperature Coefficient=±100ppm/°C, Tolerance=±1%, ComponentLink1Description=Datasheet, ComponentLink1URL=https://industrial.panasonic.com/cdbs/www-data/pdf/RDA0000/AOA0000C304.pdf, ComponentLink2Description="DigiKey Link", ComponentLink2URL=http://digikey.com/product-detail/en/panasonic-electronic-components/ERJ-6ENF3163V/P316KCCT-ND/119694, Composition="Thick Film", Features="Automotive AEC-Q200", Height - Seated (Max)="0.028\" (0.70mm)", LastUpdated="2020-09-02 1:14:42 AM", Lifecycle Status=Active, Minimum Order=1, Number of Terminations=2, Package / Case="0805 (2012 Metric)", Packaging=TapeAndReel, Part Number=ERJ-6ENF3163V, Part Status=Active, PartId=46313, Price=0.01, Resistance="316 kOhms", Series=ERJ, Size / Dimension="0.079\" L x 0.049\" W (2.00mm x 1.25mm)", Supplier 1=DigiKey
R5: library part RC0805FR-0748K7L, "RES SMD 48.7K OHM 1% 1/8W 0805", Device Package="0805 (2012 Metric)", Manufacturer=Yageo, Operating Temperature="-55°C ~ 155°C", Power (Watts)="0.125W, 1/8W", Supplier Device Package=0805, Supplier Part Number 1=311-48.7KCRCT-ND, Temperature Coefficient=±100ppm/°C, Tolerance=±1%, ComponentLink1Description=Datasheet, ComponentLink1URL=https://www.yageo.com/upload/media/product/productsearch/datasheet/rchip/PYu-RC_Group_51_RoHS_L_10.pdf, ComponentLink2Description="DigiKey Link", ComponentLink2URL=http://digikey.com/product-detail/en/yageo/RC0805FR-0748K7L/311-48.7KCRCT-ND/730928, Composition="Thick Film", Features="Moisture Resistant", Height - Seated (Max)="0.024\" (0.60mm)", LastUpdated="2020-09-02 1:15:04 AM", Lifecycle Status=Active, Minimum Order=1, Number of Terminations=2, Package / Case="0805 (2012 Metric)", Packaging=CutTape, Part Number=RC0805FR-0748K7L, Part Status=Active, PartId=36985, Price=0.10, Resistance="48.7 kOhms", Series=RC, Size / Dimension="0.079\" L x 0.049\" W (2.00mm x 1.25mm)", Supplier 1=DigiKey
R7: library part RC0805FR-07137KL, "RES SMD 137K OHM 1% 1/8W 0805", Device Package="0805 (2012 Metric)", Manufacturer=Yageo, Operating Temperature="-55°C ~ 155°C", Power (Watts)="0.125W, 1/8W", Supplier Device Package=0805, Supplier Part Number 1=311-137KCRCT-ND, Temperature Coefficient=±100ppm/°C, Tolerance=±1%, ComponentLink1Description=Datasheet, ComponentLink1URL=https://www.yageo.com/upload/media/product/productsearch/datasheet/rchip/PYu-RC_Group_51_RoHS_L_10.pdf, ComponentLink2Description="DigiKey Link", ComponentLink2URL=http://digikey.com/product-detail/en/yageo/RC0805FR-07137KL/311-137KCRCT-ND/730541, Composition="Thick Film", Features="Moisture Resistant", Height - Seated (Max)="0.024\" (0.60mm)", LastUpdated="2020-09-02 1:15:04 AM", Lifecycle Status=Active, Minimum Order=1, Number of Terminations=2, Package / Case="0805 (2012 Metric)", Packaging=CutTape, Part Number=RC0805FR-07137KL, Part Status=Active, PartId=36908, Price=0.10, Resistance="137 kOhms", Series=RC, Size / Dimension="0.079\" L x 0.049\" W (2.00mm x 1.25mm)", Supplier 1=DigiKey
R9: library part ERJ-6ENF2493V, "RES SMD 249K OHM 1% 1/8W 0805", Device Package="0805 (2012 Metric)", Manufacturer="Panasonic Electronic Components", Operating Temperature="-55°C ~ 155°C", Power (Watts)="0.125W, 1/8W", Ratings=AEC-Q200, Supplier Device Package=0805, Supplier Part Number 1=P249KCCT-ND, Temperature Coefficient=±100ppm/°C, Tolerance=±1%, ComponentLink1Description=Datasheet, ComponentLink1URL=https://industrial.panasonic.com/cdbs/www-data/pdf/RDA0000/AOA0000C304.pdf, ComponentLink2Description="DigiKey Link", ComponentLink2URL=http://digikey.com/product-detail/en/panasonic-electronic-components/ERJ-6ENF2493V/P249KCCT-ND/119664, Composition="Thick Film", Features="Automotive AEC-Q200", Height - Seated (Max)="0.028\" (0.70mm)", LastUpdated="2020-09-02 1:14:35 AM", Lifecycle Status=Active, Minimum Order=1, Number of Terminations=2, Package / Case="0805 (2012 Metric)", Packaging=TapeAndReel, Part Number=ERJ-6ENF2493V, Part Status=Active, PartId=47910, Price=0.01, Resistance="249 kOhms", Series=ERJ, Size / Dimension="0.079\" L x 0.049\" W (2.00mm x 1.25mm)", Supplier 1=DigiKey
R10 R14: library part AC0805FR-07200KL, "RES SMD 200K OHM 1% 1/8W 0805", Device Package="0805 (2012 Metric)", Manufacturer=Yageo, Operating Temperature="-55°C ~ 155°C", Power (Watts)="0.125W, 1/8W", Ratings=AEC-Q200, Supplier Device Package=0805, Supplier Part Number 1=YAG3706CT-ND, Temperature Coefficient=±100ppm/°C, Tolerance=±1%, ComponentLink1Description=Datasheet, ComponentLink1URL=https://www.yageo.com/upload/media/product/productsearch/datasheet/rchip/PYu-AC_51_RoHS_L_7.pdf, ComponentLink2Description="DigiKey Link", ComponentLink2URL=http://digikey.com/product-detail/en/yageo/AC0805FR-07200KL/YAG3706CT-ND/6006555, Composition="Thick Film", Features="Automotive AEC-Q200, Moisture Resistant", Height - Seated (Max)="0.024\" (0.60mm)", LastUpdated="2020-09-02 1:14:54 AM", Lifecycle Status=Active, Minimum Order=1, Number of Terminations=2, Package / Case="0805 (2012 Metric)", Packaging=TapeAndReel, Part Number=AC0805FR-07200KL, Part Status=Active, PartId=41383, Price=0.01, Resistance="200 kOhms", Series=AC, Size / Dimension="0.079\" L x 0.049\" W (2.00mm x 1.25mm)", Supplier 1=DigiKey
R11: library part RMCF0805FT2K49, "RES 2.49K OHM 1% 1/8W 0805", Device Package="0805 (2012 Metric)", Manufacturer="Stackpole Electronics Inc", Operating Temperature="-55°C ~ 155°C", Power (Watts)="0.125W, 1/8W", Ratings=AEC-Q200, Supplier Device Package=0805, Supplier Part Number 1=RMCF0805FT2K49CT-ND, Temperature Coefficient=±100ppm/°C, Tolerance=±1%, ComponentLink1Description=Datasheet, ComponentLink1URL=https://www.seielect.com/catalog/sei-rmcf_rmcp.pdf, ComponentLink2Description="DigiKey Link", ComponentLink2URL=http://digikey.com/product-detail/en/stackpole-electronics-inc/RMCF0805FT2K49/RMCF0805FT2K49CT-ND/1942392, Composition="Thick Film", Features="Automotive AEC-Q200", Height - Seated (Max)="0.026\" (0.65mm)", LastUpdated="2020-09-02 1:15:14 AM", Lifecycle Status=Active, Minimum Order=1, Number of Terminations=2, Package / Case="0805 (2012 Metric)", Packaging=CutTape, Part Number=RMCF0805FT2K49, Part Status=Active, PartId=32443, Price=0.10, Resistance="2.49 kOhms", Series=RMCF, Size / Dimension="0.079\" L x 0.049\" W (2.00mm x 1.25mm)", Supplier 1=DigiKey
R13: library part ERJ-6ENF1743V, "RES SMD 174K OHM 1% 1/8W 0805", Device Package="0805 (2012 Metric)", Manufacturer="Panasonic Electronic Components", Operating Temperature="-55°C ~ 155°C", Power (Watts)="0.125W, 1/8W", Ratings=AEC-Q200, Supplier Device Package=0805, Supplier Part Number 1=P174KCCT-ND, Temperature Coefficient=±100ppm/°C, Tolerance=±1%, ComponentLink1Description=Datasheet, ComponentLink1URL=https://industrial.panasonic.com/cdbs/www-data/pdf/RDA0000/AOA0000C304.pdf, ComponentLink2Description="DigiKey Link", ComponentLink2URL=http://digikey.com/product-detail/en/panasonic-electronic-components/ERJ-6ENF1743V/P174KCCT-ND/111154, Composition="Thick Film", Features="Automotive AEC-Q200", Height - Seated (Max)="0.028\" (0.70mm)", LastUpdated="2020-09-02 1:14:42 AM", Lifecycle Status=Active, Minimum Order=1, Number of Terminations=2, Package / Case="0805 (2012 Metric)", Packaging=TapeAndReel, Part Number=ERJ-6ENF1743V, Part Status=Active, PartId=46286, Price=0.01, Resistance="174 kOhms", Series=ERJ, Size / Dimension="0.079\" L x 0.049\" W (2.00mm x 1.25mm)", Supplier 1=DigiKey
R15: library part ERJ-6ENF26R7V, "RES SMD 26.7 OHM 1% 1/8W 0805", Device Package="0805 (2012 Metric)", Manufacturer="Panasonic Electronic Components", Operating Temperature="-55°C ~ 155°C", Power (Watts)="0.125W, 1/8W", Ratings=AEC-Q200, Supplier Device Package=0805, Supplier Part Number 1=P26.7CCT-ND, Temperature Coefficient=±100ppm/°C, Tolerance=±1%, ComponentLink1Description=Datasheet, ComponentLink1URL=https://industrial.panasonic.com/cdbs/www-data/pdf/RDA0000/AOA0000C304.pdf, ComponentLink2Description="DigiKey Link", ComponentLink2URL=http://digikey.com/product-detail/en/panasonic-electronic-components/ERJ-6ENF26R7V/P26.7CCT-ND/118502, Composition="Thick Film", Features="Automotive AEC-Q200", Height - Seated (Max)="0.028\" (0.70mm)", LastUpdated="2020-09-02 1:14:57 AM", Lifecycle Status=Active, Minimum Order=1, Number of Terminations=2, Package / Case="0805 (2012 Metric)", Packaging=TapeAndReel, Part Number=ERJ-6ENF26R7V, Part Status=Active, PartId=40270, Price=0.01, Resistance="26.7 Ohms", Series=ERJ, Size / Dimension="0.079\" L x 0.049\" W (2.00mm x 1.25mm)", Supplier 1=DigiKey
R19: library part ERJ-6ENF3921V, "RES SMD 3.92K OHM 1% 1/8W 0805", Device Package="0805 (2012 Metric)", Manufacturer="Panasonic Electronic Components", Operating Temperature="-55°C ~ 155°C", Power (Watts)="0.125W, 1/8W", Ratings=AEC-Q200, Supplier Device Package=0805, Supplier Part Number 1=P3.92KCCT-ND, Temperature Coefficient=±100ppm/°C, Tolerance=±1%, ComponentLink1Description=Datasheet, ComponentLink1URL=https://industrial.panasonic.com/cdbs/www-data/pdf/RDA0000/AOA0000C304.pdf, ComponentLink2Description="DigiKey Link", ComponentLink2URL=http://digikey.com/product-detail/en/panasonic-electronic-components/ERJ-6ENF3921V/P3.92KCCT-ND/119131, Composition="Thick Film", Features="Automotive AEC-Q200", Height - Seated (Max)="0.028\" (0.70mm)", LastUpdated="2020-09-02 1:15:19 AM", Lifecycle Status=Active, Minimum Order=1, Number of Terminations=2, Package / Case="0805 (2012 Metric)", Packaging=TapeAndReel, Part Number=ERJ-6ENF3921V, Part Status=Active, PartId=30261, Price=0.01, Resistance="3.92 kOhms", Series=ERJ, Size / Dimension="0.079\" L x 0.049\" W (2.00mm x 1.25mm)", Supplier 1=DigiKey
R21: library part ERJ-6ENF6041V, "RES SMD 6.04K OHM 1% 1/8W 0805", Device Package="0805 (2012 Metric)", Manufacturer="Panasonic Electronic Components", Operating Temperature="-55°C ~ 155°C", Power (Watts)="0.125W, 1/8W", Ratings=AEC-Q200, Supplier Device Package=0805, Supplier Part Number 1=P6.04KCCT-ND, Temperature Coefficient=±100ppm/°C, Tolerance=±1%, ComponentLink1Description=Datasheet, ComponentLink1URL=https://industrial.panasonic.com/cdbs/www-data/pdf/RDA0000/AOA0000C304.pdf, ComponentLink2Description="DigiKey Link", ComponentLink2URL=http://digikey.com/product-detail/en/panasonic-electronic-components/ERJ-6ENF6041V/P6.04KCCT-ND/119185, Composition="Thick Film", Features="Automotive AEC-Q200", Height - Seated (Max)="0.028\" (0.70mm)", LastUpdated="2020-09-02 1:15:19 AM", Lifecycle Status=Active, Minimum Order=1, Number of Terminations=2, Package / Case="0805 (2012 Metric)", Packaging=TapeAndReel, Part Number=ERJ-6ENF6041V, Part Status=Active, PartId=30248, Price=0.01, Resistance="6.04 kOhms", Series=ERJ, Size / Dimension="0.079\" L x 0.049\" W (2.00mm x 1.25mm)", Supplier 1=DigiKey
TP1 TP2 TP3 TP4 TP5 TP6 TP7 TP8 TP9: library part CMP-1672-00008-1, "Test Point, 1 Position SMD, RoHS, Tape and Reel", Package Quantity=1000, ComponentLink1Description="Manufacturer URL", ComponentLink1URL=http://www.keyelco.com/, ComponentLink2Description=Datasheet, ComponentLink2URL=http://www.keyelco.com/product-pdf.cfm?p=1357, Contact Plating=Silver, DatasheetVersion=03/2014, Mount="Surface Mount", Mounting Technology="Surface Mount", PackageDescription="1-Pin Surface Mount Device, Body 3.81 x 2.03 mm", PackageReference=5019, Packaging="Tape and Reel", Pins=1, RoHSCompliant=True
U1: library part LT8602
U3 U4: library part CMP-0062-00227-3, "1.5A FlexCap Low Dropout Linear Regulator for 2.7V to 5.5V Inputs, 5-pin TO-263 Thin, Pb-Free", Manufacturer="Texas Instruments", PackageTopMarking=NSUZXYTTE#*LP38502*TJ-ADJ, PowerWise=N, ComponentLink1Description="Datasheet URL", ComponentLink1URL=http://www.ti.com/general/docs/lit/getliterature.tsp?genericPartNumber=LP38502-ADJ&fileType=pdf, CompType="LDO IC", PackageDescription="Thin TO-263, Molded, 9.85 x 10.16 x 2mm Body, 5 Lead, 1.7mm Pitch, Surface Mount", PackageReference=NDQ0005A, PinCount=5, RoHS=Y

## Free pads (board coordinates)
  round 60 hole 120 unplated: 2(1416,4863) 2(1446,2601) 2(2916,4863) 2(2946,2601)

## Via types
v1: diameter 23.62, hole 15.75, Top Layer to Bottom Layer, 116 vias
v2: diameter 19.68, hole 11.81, Top Layer to Bottom Layer, 9 vias

## Nets (pads, with @x,y where several pads share a name; then routed paths per layer and width w, separated by ;. In a path a pad name is that pad's centre, name@x,y a point inside that pad or via, vN(x,y) a via of type N, cw(c..) or ccw(c..) an arc to the next point about the centre after c; other vN are vias at no path point)
+1: C30.1 C31.1 P7.1 R19.2 U4.4 | length 1117.7
  Top Layer w25: R19.2 C31.1 C30.1 2697.15,4102.36 2697.15,4197.53 U4.4 2691.93,4278.36 2706.57,4293 2886,4293 3015,4164 P7.1
+1.2: C27.1 C28.1 P6.6 R18.2 U3.4 | length 1142.8
  Top Layer w25: P6.6 1320,3934.82 1672.18,4287 2014.05,4287 2061.93,4239.12 U3.4
+1.5: C21.2 C22.2 C23.2 C24.2 L4.2 P1.1 P3.1 P6.2 R13.1 | length 470.2
  Top Layer w20: R13.1 1835.25,3092.25 1835.25,3165.75 C24.2 C23.2
  Top Layer w50: P6.2 1621,3339 P1.1
+1.8: C19.2 C20.2 L3.2 P7.3 R9.1 | length 374.2
  Top Layer w50: C19.2 2761.5,3537.71 2792.79,3569 P7.3
+1.25: *.1 P6.1 R11.2 | length 470
  Bottom Layer w12: *.1 1680,3223.45 R11.2
  Bottom Layer w25: P6.1 1457.01,3239 1494.01,3276 1634.49,3276 1681.55,3228.94 R11.2
+3.3: C11.2 C12.2 C13.2 C14.2 C17.2 L2.2 P2.1 P4.1 P6.4 R4.1 R12.1 U1.12 U1.21 | length 662.2
  Top Layer w10: v1(1956,2976) 2039.43,2892.57 2149.91,2892.57 2167.55,2874.94 R4.1 2167.55,2947.54 C11.2 ; v1(2079,3543) 2080.62,3543 2106.3,3517.32 U1.12
  Bottom Layer w10: v1(1953,3156) 1954.5,3154.5 1954.5,2977.5 v1(1956,2976) ; R12.1 2033.64,3546.26 2072.05,3546.26 2075.31,3543 v1(2079,3543)
  other v1: 1992,3156 1974,3180 2007,3180
+5: C3.2 C4.2 C16.2 L1.2 P5.1 P7.2 R2.1 R8.1 U1.40 | length 227.3
  Bottom Layer w10: R8.1 2485.45,3227.06 2503.09,3209.43 2507.02,3209.43 2533.45,3183 2655.14,3183 2661,3188.86 v1(2661,3216)
  other v1: 2598,3216 2628,3216 2583,3240 2613,3240 2646,3240 2676,3240
DDQ: C2.1 C10.2 P1.2 U2.1 U2.6 | length 831.3
  Top Layer w15: C2.1 1462.97,3607.5 1494.24,3638.77 1494.24,3670.14 U2.1 1494.61,3682.32 1470,3706.94 1470,3721.51 1469.5,3722.01 1469.5,3807.99 1477.41,3815.9 1536.63,3815.9 1545.42,3824.69 1545.42,3855.18 U2.6 1545.8,3902.3 C10.2
  Top Layer w50: C2.1 1460.41,3606.91 1426.41,3606.91 1398,3578.49 1398,3476.29 1427.29,3447 P1.2
EN: P8.3 R5.1 R6.2 U1.26 | length 654.5
  Top Layer w10: v1@2138.64,3226.82 2141.99,3223.47 2147.01,3223.47 2157.65,3212.82 2161.42,3209.06 U1.26
  Bottom Layer w10: R5.1 R5.1@2136.94,3098.9 ; v1(2138.64,3226.08) 2169,3195.72 2169,3134.9 2154.57,3120.47 2154.57,3116.54 R5.1@2136.94,3098.9 ; P8.3 2266,3047.83 2214.94,3098.9 R6.2 R5.1@2136.94,3098.9
GND: *.2 C1.2 C2.2 C3.1 C6.1 C7.1 C8.1 C10.1 C12.1 C13.1 C14.1 C15.1 C16.1 C17.1 C18.1 C19.1 C21.1 C22.1 C23.1 C25.1 C26.2 C27.2 C28.2 C29.2 C30.2 C31.2 C32.2 C33.2 C34.2 C35.2 C36.2 P8.1 R3.2 R6.1 R7.2 R10.2 R14.2 R15.1 R20.1 R21.1 U1.2 U1.3 U1.10 U1.11 U1.15 U1.18 U1.20 U1.22 U1.30 U1.38 U1.39 U1.41 U1.43 U1.46 U1.47 U1.49 U2.3 U2.9 U3.3 U3.6 U4.3 U4.6 | length 2069.5
  Top Layer w10: U1.22 2082.76,3281.18 2110.67,3281.18 2113.62,3284.13 2184.13,3284.13 2193.27,3293.27 v2(2193.27,3297.32) ; U1.30 2240.16,3284.21 v2(2253.27,3297.32) ; C32.2@2528.03,3388.5 C32.2
  Top Layer w15: C1.2 1458.43,3934.93 v1(1458.43,3953.57) ; v1(1461,3495) C2.2 C7.1 ; v1(1500,3765) U2.9@1515,3765 ; v1(1539,3495) C7.1 ; U2.3 1545.8,3752.2 v1(1533,3765) v1(1566,3765) ; C10.1 1564.5,3981 1611.67,3981 1617.67,3975 v1(1620,3975) 1620.94,3974.06 1620.94,3937.59 1639.03,3919.5 C8.1 ; v1(1671,3543) 1618.5,3543 C6.1 C7.1
  Top Layer w25: v1(1791,3034.81) 1799.74,3026.07 1824.41,3026.07 1834.55,3015.94 R14.2 ; v1(1956,4020) C28.2 2001,4018.5 v1(2001,3972) ; v1(2049,3036) C35.2 2093.88,3028.38 v1(2093.88,2990.5) ; v1(2055,3069) 2068.06,3082.06 2071.53,3082.06 2101.5,3112.03 C36.2 ; v1(2370,3066) C25.1 ; v1(2376,2904) 2376,2947.55 R7.2 ; v1(2391,3165) 2383.09,3157.09 2383.09,3127.09 C25.1 ; v1(2412,3123) 2379,3123 C25.1 ; v1(2535,2940) 2533.45,2941.55 R3.2 v1(2583,2994) ; v1(2596.94,4021.94) 2628.41,4021.94 2633.36,4017 C31.2 2640,4015.5 v1(2640,3969) ; v1(2625,4588.57) U4.3 U4.3@2625.75,4202 ; C29.2@2625.75,4095.75 C29.2 C29.2@2634,4087.5 ; v1(2841,3522) 2841,3482.9 R10.2 2840.9,3477 v1(2883,3477)
  other v1: 2604,3282 2640,3285 2589,3309 2619,3309 2469,3525 2517,3525 2574,3525 2607,3525 2643,3525 2427,3534 2610,3561 1866,3573 2418,3573 2064,3576 2103,3576 2436,3597 1839,3600 2079,3606 2466,3621 2055,3633 2493,3645 2524.19,3648 2569.81,3648 1956,3651 1992,3651 2025,3651 2580,3690 1926,3693 2229,3696 2274,3696 1911,3726 2208,3729 2250,3729 2292,3729 2583,3729 2181,4143 2811,4143 1904.75,4465.23 1994.75,4465.23 2084.75,4465.23 2538,4470 2625,4470 2712,4470 1994.75,4586.81 2709,4587 1901.75,4588.23 2084.75,4588.23 2538,4590 2538,4698 2622,4701 2709,4701 1898.75,4708.23 1991.75,4708.23 2084.75,4708.23
  other v2: 2303.27,3297.32 2193.27,3347.32 2253.27,3347.32 2303.27,3347.32 2193.27,3402.32 2253.27,3402.32 2303.27,3402.32
NetC4_1: C4.1 R2.2 R3.1 TP1.1 U1.31 | length 1063.7
  Top Layer w10: U1.31 2259.76,3182.6 2259.76,3159.05 2259,3158.28 2259,3015 2280,2994 R3.1 2464.55,2938.45 2526,2877 v1(2805,2877)
  Top Layer w25: R3.1 R2.2 2467.53,3074.98 2467.53,3147.02 C4.1
  Bottom Layer w10: v1(2805,2877) 2805,2970 TP1.1
NetC5_1: C5.1 U1.6
NetC5_2: C5.2 L1.1 U1.4 U1.5
NetC8_2: C8.2 P2.2 R1.1 U2.5 | length 417.7
  Top Layer w15: U2.5 1571.39,3856.13 1571.76,3856.5 C8.2 1689,3856.5 1689,3903 ; R1.1 1588.45,4055.06 1689,3954.51 1689,3903 ; P2.2 1692,3906 1689,3903
NetC9_1: C9.1 U1.7
NetC9_2: C9.2 L2.1 U1.8 U1.9
NetC11_1: C11.1 R4.2 R7.1 TP2.1 U1.29 | length 801.7
  Top Layer w10: v1(2019,2853) 2038.57,2833.43 2202.81,2833.43 2236.45,2867.06 R4.2 2236.45,2944.55 C11.1 ; v1(2217,3234) 2217,3230.31 2220.47,3226.84 U1.29 2220.47,3072.63 2232,3061.1 C11.1 ; R7.1 C11.1
  Bottom Layer w10: TP2.1 1938,2853 v1(2019,2853)
NetC15_2: C15.2 TP3.1 U1.25 | length 694.6
  Top Layer w10: v1(2109,3177) 2112.69,3177 2118.36,3182.68 U1.25
  Bottom Layer w10: TP3.1 1706.14,2877 1741.1,2911.96 1741.1,2926.1 1749,2934 2010.58,2934 2016.44,2939.86 2016.44,3127.65 2033.29,3144.5 2076.5,3144.5 v1(2109,3177)
NetC20_1: C20.1 R9.2 R10.1 TP4.1 U1.32 | length 1199.7
  Top Layer w10: v1(2268,3240) 2270.61,3237.39 2270.61,3217.98 2279.45,3209.14 2279.45,3182.76 U1.32
  Top Layer w25: v1(2811,3132) R9.2 2814.94,3190.55 2842.7,3218.31 2845.24,3218.31 2874,3247.07 C20.1 2860.91,3349.09 2860.91,3392.03 2841.94,3411 R10.1
  Bottom Layer w10: v1(2268,3240) 2268,3236.33 2277,3227.33 2277,3098.86 2282.86,3093 2772,3093 v1(2811,3132) ; TP4.1 2703,3090
NetC24_1: C24.1 R13.2 R14.1 TP5.1 U1.28 | length 1164.5
  Top Layer w10: v1(1575,3054) 1578,3054 1602,3030 1602,3012 1639.57,2974.43 1869.81,2974.43 1903.45,3008.06 R14.1 2013,3012 2061,2964 2112,2964 2145.44,2997.44 2194.64,2997.44 2201.09,3003.88 2201.09,3146.12 2200.79,3146.41 U1.28
  Top Layer w20: C24.1 1901.2,3167.3 1901.2,3090.7 R13.2 1902.67,3089.22 1902.67,3012.78 R14.1
  Bottom Layer w10: TP5.1 1575,3150 v1(1575,3054)
NetC25_2: C25.2 U1.33 | length 71.9
  Top Layer w10: U1.33 2299.21,3121.8 C25.2
NetC26_1: C26.1 P4.2 R16.1 U3.2 | length 118.3
  Top Layer w25: R16.1 1859.22,4094.22 1859.22,3991.78 P4.2 P4.2@1868.17,3988
NetC29_1: C29.1 P5.2 R17.1 U4.2 | length 278.6
  Top Layer w25: P5.2 2489.95,4000.05 2489.95,4094.95 R17.1 C29.1 2563.5,4157.94 2558.07,4163.38 U4.2
NetL3_1: L3.1 U1.42 | length 276.2
  Top Layer w10: U1.42 2693.35,3340.16 L3.1@2693.5,3340
NetL4_1: L4.1 U1.19 | length 176.8
  Top Layer w10: L4.1 1907.56,3340.16 U1.19
NetP3_2: P3.2 R11.1 | length 269.8
  Bottom Layer w12: P3.2 1692,3390 1692,3287.39 1750.45,3228.94 R11.1
NetR1_2: R1.2 U2.7 | length 203.7
  Top Layer w15: R1.2 1520.2,4058.35 U2.7
NetR15_2: R15.2 U1.34 | length 177.2
  Top Layer w10: v1@2299.81,3231 2318.82,3211.99 2318.82,3182.76 U1.34
  Bottom Layer w10: v1(2299.81,3233.48) 2299.81,3137.21 2298,3137.21 2309.73,3125.48 R15.2@2316,3125.48
NetR16_2: R16.2 U3.1 | length 147.7
  Top Layer w25: R16.2 1796.69,4108.14 1796.69,4121.69 1830.16,4155.16 1855.93,4155.16 1861.14,4160.38 U3.1
NetR17_2: R17.2 U4.1 | length 141.6
  Top Layer w25: R17.2 2431.14,4105.14 2431.14,4111.62 2477.68,4158.16 2485.93,4158.16 2491.14,4163.38 U4.1
NetR18_1: R18.1 R20.2 U3.5 | length 304.5
  Top Layer w25: U3.5 2128.86,4193.22 2134.07,4188 2202,4188 2259.31,4130.69 2259.31,4108.14 R20.2 2259.31,4087.86 2259.31,4078.25 2205,4023.94 R18.1
NetR19_1: R19.1 R21.2 U4.5 | length 301.5
  Top Layer w25: U4.5 2807.18,4202.75 2898.31,4111.62 2898.31,4105.14 R21.2 2898.31,4084.86 2898.31,4072.25 2847,4020.94 R19.1
PG1: R8.2 TP6.1 U1.1 U1.35 | length 1975.4
  Top Layer w10: U1.35 2338.58,3223.27 2349.71,3234.39 2364.39,3234.39 v1(2367,3237) ; U1.1@2358.27,3496.73 2358.27,3471.42 2361,3468.69 v1(2361,3465)
  Bottom Layer w10: v1(2361,3465) 2387.32,3438.68 2390.32,3438.68 ; R8.2 2410.55,3237 v1(2367,3237) 2367,3301.02 2417.32,3351.34 2417.32,3411.68 2390.32,3438.68 ; TP6.1 2832,3792 2704.68,3792 2568,3928.68 2568,3996 2493,4071 2325,4071 2319,4065 2319,3951 2547,3723 2547,3638.55 2557.81,3627.74 2557.81,3581.26 2547,3570.45 2547,3486 2499.68,3438.68 2390.32,3438.68
PG2: R12.2 TP7.1 U1.13 U1.23 | length 2007.4
  Top Layer w10: v1(2077.87,3481.13) 2077.87,3458.35 2077.95,3458.27 U1.13 ; U1.23 2082.76,3261.34 2121.19,3261.34 v1(2122.13,3260.39)
  Bottom Layer w10: R12.2 2055.74,3495 2067,3483.74 2077.52,3483.74 2079,3482.26 2129.06,3532.32 2129.06,3537.69 2177.65,3586.28 2230.37,3586.28 2331,3686.91 2331,3885 2287,3929 2287,4082.63 2307.37,4103 2548.15,4103 2662.81,3988.34 2662.81,3934.19 2710.72,3886.28 2812.28,3886.28 TP7.1 ; v1@2076.74,3480 2058.75,3462.01 2058.01,3462.01 2031,3435 2031,3206.86 2036.86,3201 2082,3201 2119.53,3238.53 2119.53,3257.78 v1(2122.13,3260.39)
PG3: C18.2 TP8.1 U1.24 U1.48 | length 2039
  Top Layer w10: v1(2053.81,3223.81) 2056.42,3226.42 2056.42,3235.98 U1.24@2062.09,3241.65 ; v1(2391,3531) 2417.32,3504.68 U1.48 ; v1(2604,3948) 2606.5,3945.5 2707.58,3945.5 2726.08,3927 v1@2727,3927
  Bottom Layer w10: v1(2053.81,3223.81) 2053.81,3321.34 2049,3326.15 2049,3420 2160,3531 v1(2391,3531) 2391,3625.5 ; C18.2@2429.02,3665.49 2422.44,3658.91 2422.44,3656.94 2391,3625.5 ; C18.2@2430,3664.5 C18.2 ; v1(2604,3948) 2584,3968 2584,4002.63 2499.63,4087 2314,4087 2303,4076 2303,3935.63 2391,3847.63 2391,3625.5 ; v1(2727,3930) 2727,3961.84 2768.2,4003.04 2803.16,4038 TP8.1
PG4: TP9.1 U1.14 | length 456.6
  Top Layer w10: v1(2070,3513) 2072.61,3510.39 2089.92,3510.39 2127,3473.31 2127,3444.44 2121.14,3438.58 U1.14
  Bottom Layer w10: v1(2070,3513) 2072.61,3515.61 2083.87,3515.61 2122.78,3554.52 2123.26,3554.52 2152.73,3583.99 2152.73,3592.27 2112,3633 2112,3706.04 2077.04,3741 TP9.1
Vin: C32.1 C33.1 C34.1 C35.1 C36.1 P8.2 R5.2 U1.16 U1.17 U1.27 U1.44 U1.45 | length 981.2
  Top Layer w10: C35.1 C36.1 2181.1,3130.61 U1.27 2181.1,3248.21 2175,3254.31 v1(2175,3258)
  Bottom Layer w25: v1(2112,3390) 2140.86,3390 2181.53,3430.67 2315.01,3430.67 2331.61,3414.06 2331.61,3404.39 v1(2346,3390) v1(2376,3390) ; R5.2 2136,3033 v1(2154,3033) 2165.93,3021.07 2165.93,2757.07 P8.2 ; v1(2148,3390) 2148,3285 v1(2175,3258)
Vtt: C6.2 C7.2 P6.3 U2.2 U2.4 | length 650.8
  Top Layer w15: C7.2@1546.03,3592.5 C7.2@1548,3592.5 ; C6.2@1606.49,3618.01 C6.2
  Top Layer w25: P6.3 1329.22,3439 1369.24,3398.97 1656.36,3398.97 1700.97,3443.59 1700.97,3499.4 1701.31,3499.74 1701.31,3555.56 1677.87,3579 1671,3579 1655.59,3594.41 1630.09,3594.41 C6.2
Vttref: C1.1 P6.5 U2.8 | length 321.6
  Top Layer w15: C1.1 1443.95,3855.55 U2.8
  Top Layer w50: P6.5 1320,3641.45 1410,3731.45 1410,3825.47 1441.03,3856.5 C1.1
pads on no net: *.3 U1.36 U1.37

## Polygon pours and split planes (outlines as drawn)
+1.8 on Top Layer "+1.8_L01_P041" (solid, pour order 41): 2736,3456 2736,3285 2784,3237 2838,3237 2838,3363 2787,3414 2787,3456
+5 on Top Layer "+5_L01_P039" (solid, pour order 39): 2508,3255 2508,3042 2559,3042 2559,3201 2694,3201 2694,3255
+3.3 on Top Layer "+3.3_L01_P035" (solid, pour order 35): 1938,3207 1938,3141 2025,3141 2025,3186 2004,3207
GND on Top Layer "GND_L01_P033" (solid, pour order 33): 2103,4071 2103,4125 2154,4125 2160,4131 2160,4161 2196,4161 2223,4134 2223,4071
+1.2 on Top Layer "+1.2_L01_P032" (solid, pour order 32): 2046,4254 2079,4254 2079,4137 2091,4125 2091,4068 2112,4047 2157,4047 2157,3993 2040,3993 2040,4140 2046,4146
GND on Top Layer "GND_L01_P031" (solid, pour order 31): 1977,4257 2013,4257 2013,4128 2016,4125 2016,4059 2028,4047 2028,3993 1977,3993 1977,4059 1965,4071 1965,4128 1977,4140
NetC26_1 on Top Layer "NETC26_1_L01_P030" (solid, pour order 30): 1833,4071 1953,4071 1953,4137 1944,4146 1944,4254 1911,4254 1911,4143 1893,4125 1833,4125
GND on Top Layer "GND_L01_P029" (solid, pour order 29): 2607,4146 2601,4140 2601,4068 2616,4053 2616,3990 2667,3990 2667,4053 2652,4068 2652,4137 2643,4146 2643,4260 2607,4260
GND on Top Layer "GND_L01_P028" (solid, pour order 28): 2742,4122 2778,4122 2793,4137 2793,4164 2820,4164 2862,4122 2862,4068 2742,4068
+3.3 on Top Layer "+3.3_L01_P025" (solid, pour order 25): 1677,3801 1710,3834 1833,3834 1833,3924 2172,3924 2172,3759 1887,3759 1887,3687 1677,3687
Vtt on Top Layer "VTT_L01_P024" (solid, pour order 24): 1512,3690 1530,3690 1530,3633 1563,3633 1563,3690 1587,3690 1644,3633 1644,3582 1512,3582
+3.3 on Top Layer "+3.3_L01_P023" (solid, pour order 23): 1950,3204 2004,3204 2049,3294 2109,3294 2109,3306 2037,3306 2010,3255 1950,3255
GND on Top Layer "GND_L01_P022" (solid, pour order 22): 1875,3273 1920,3273 1950,3303 1950,3327 2193,3327 2193,3315 2052,3315 2034,3315 2010,3267 1950,3267 1926,3243 1926,3219 1875,3219
+1.5 on Top Layer "+1.5_L01_P021" (solid, pour order 21): 1812,3537 1863,3537 1863,3396 1845,3378 1845,3291 1863,3273 1863,3219 1812,3219 1812,3315 1599,3315 1599,3378 1785,3378 1812,3405